# Altium PCB B_Card.PcbDoc
Units mm, origin at the board's own origin, x right, y up, seen from the top; angles counter-clockwise.
Board outline 85.6 x 65.43 mm, 2 copper layers (Top Component Side, Bottom Layer), stack 0.86 mm thick; 13 components, 9 nets, 39 pads, 13 vias.
Unrouted connection lines stored in the file: 2.
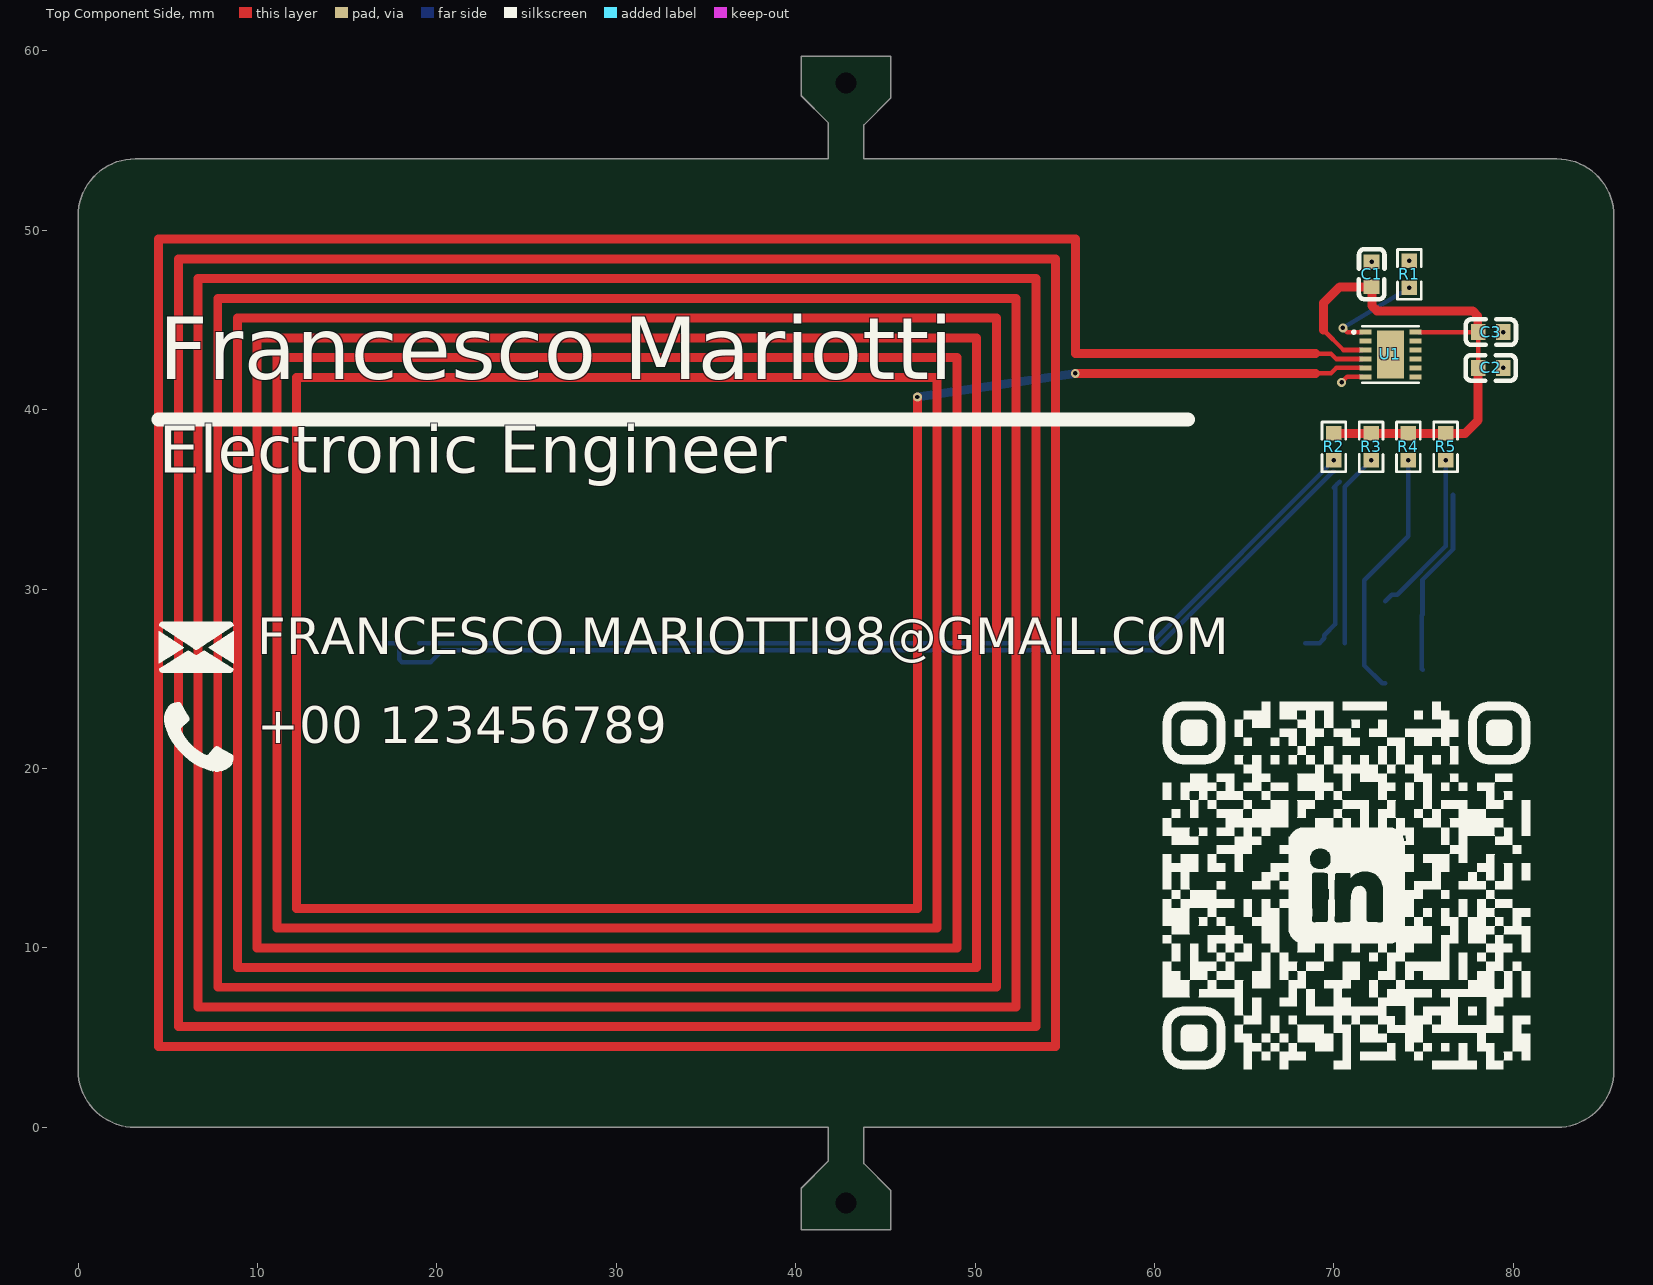
[diagram p0: Top Component Side view]
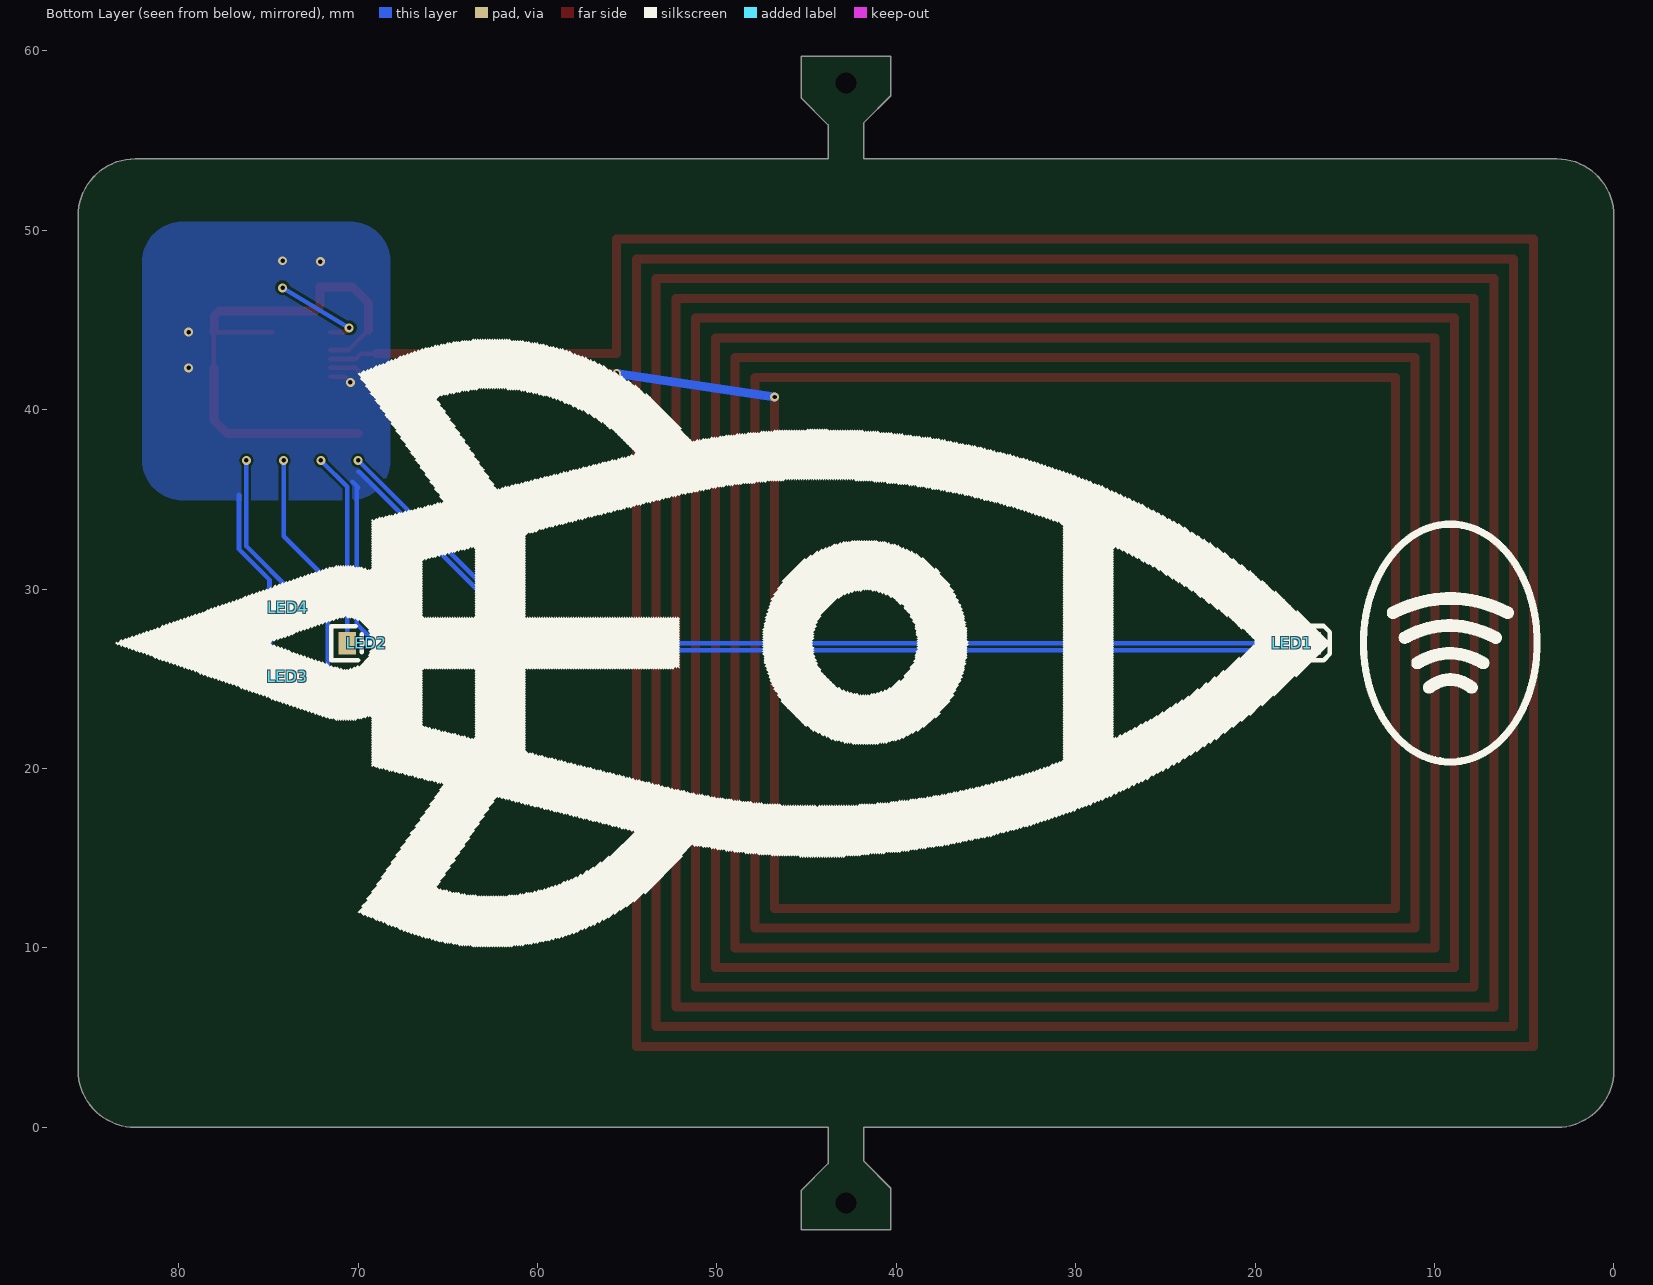
[diagram p1: Bottom Layer view, seen from below]

## Layer stack, top to bottom
Top Solder: solder mask 0.0102, Solder Resist, Dk 3.5
Top Component Side: signal copper 0.03
Dielectric 3: prepreg 0.8, FR-4, Dk 4.58
Bottom Layer: signal copper 0.03
Bottom Solder: solder mask 0.0102, Solder Resist, Dk 3.5

## Board outline
40.3,-5.725 40.3,-3.395 41.8,-1.895 41.8,0 3.18,0 cw(c3.18,3.18) 0,3.18 0,50.8 cw(c3.18,50.8) 3.18,53.98 41.8,53.98 41.8,56 40.3,57.5 40.3,59.705 45.3,59.705 45.3,57.375 43.8,55.875 43.8,53.98 82.42,53.98 cw(c82.42,50.8) 85.6,50.8 85.6,3.18 cw(c82.42,3.18) 82.42,0 43.8,0 43.8,-2.02 45.3,-3.52 45.3,-5.725

## Design rules (kind name [scope] priority, off if disabled: settings)
AssemblyTestPointUsage SilkToBoardRegionClearance [All] p2:
BoardOutlineClearance [All] p1: gap=2 ignorepadtopadclearanceinfootprint=FALSE
Clearance [All] p1: gap=0.152 ignorepadtopadclearanceinfootprint=FALSE except(0: Arc-Hole Track-Hole SMDPad-Hole THPad-Hole Via-Hole Fill-Hole Poly-Hole Region-Hole Text-Hole)
MatchedLengths DiffPair_DIFF100MatchedLengths [InDifferentialPairClass('DIFF100')] p1: tolerance=0.152 checknetsindiffpair=TRUE checkdiffpairvsdiffpair=FALSE checkxsignals=FALSE checkothers=FALSE
MinimumSolderMaskSliver SilkscreenOverComponentPads_1 [All] p2: minsoldermaskwidth=0.254
MinimumSolderMaskSliver SilkToSolderMaskClearance [IsPad] p3: minsoldermaskwidth=0.254
MinimumSolderMaskSliver SilkscreenOverComponentPads [All] p4: minsoldermaskwidth=0.254
PolygonConnect [All] p1: connectstyle=Direct reliefconductorwidth=0.254 reliefentries=4 polygonreliefangle="90 Angle" airgapwidth=0.254
RoutingVias [All] p1: holewidth=0.305 width=0.635 viastyle="Through Hole" minholewidth=0.305 minwidth=0.635 maxholewidth=0.711 maxwidth=1.27
SilkToBoardRegionClearance SilkToBoardRegionClearance_1 [All] p1:
SilkToSolderMaskClearance SilkToSolderMaskClearance_1 [IsPad] p1: minsilkscreentomaskgap=0.254 clearancetoexposedcopper=TRUE
SolderMaskExpansion [All] p1: expansion=0.102 istentingtop=FALSE
Width [All] p1: maxlimit=2.54 minlimit=0.152 preferedwidth=0.254
28 further rules are at their usual default settings.

## Components (designator, comment, footprint, x,y, rotation, side; value= is the part's Value field where it differs from the comment)
C1 "10nF" C0603 72.1,47.547 r270 top locked
C2 "10nF" C0603 78.739,42.325 r0 top locked
C3 "100nF" C0603 78.739,44.325 r180 top locked
LED1 "XL-2012UWC" LED0805-RD_WHITE 17.925,26.99 r0 bottom
LED2 "XL-2012UWC" LED0805-RD_WHITE 69.5,26.99 r0 bottom
LED3 "XL-2012UWC" LED0805-RD_WHITE 73.903,25.125 r200 bottom
LED4 "XL-2012UWC" LED0805-RD_WHITE 73.9,28.95 r160 bottom
R1 "1kΩ" R0603 74.2,47.547 r90 top locked
R2 "1kΩ" R0603 69.996,37.923 r90 top
R3 "1kΩ" R0603 72.073,37.923 r90 top
R4 "1kΩ" R0603 74.15,37.923 r90 top
R5 "1kΩ" R0603 76.227,37.923 r90 top
U1 "ST25DV04K-JFR8D3" UDFN-12_L3.0-W3.0-P0.50-BL-EP 73.15,43.075 r270 top

## Footprints (in the part's own frame and the unit in brackets; to place one, negate y for a bottom-side part, rotate by r counter-clockwise, add the part's x,y. Pads: shape width x height; smd on the part's side, far side on the other; paste and mask are expansions set on the pad)
C0603 [mm]
  rect 0.8x0.9 smd: 1(-0.7,0) 2(0.7,0)
  silkscreen extent -1.41,-0.71 1.39,0.72
LED0805-RD_WHITE [mm]
  rect 1x1.25 smd: 1(-1.1,0) 2(1.1,0)
  silkscreen extent -2.1,-0.95 1.98,0.96
R0603 [mm]
  rect 0.806x0.864 smd: 1(-0.753,0) 2(0.753,0)
  silkscreen extent -1.39,-0.66 1.39,0.66
UDFN-12_L3.0-W3.0-P0.50-BL-EP [mm]
  rect 0.28x0.665 smd: 1(-1.25,-1.401) 2(-0.75,-1.401) 3(-0.25,-1.401) 4(0.25,-1.401) 5(0.75,-1.401) 6(1.25,-1.401) 7(1.25,1.4) 8(0.75,1.4) 9(0.25,1.4) 10(-0.25,1.4) 11(-0.75,1.4) 12(-1.25,1.4)
  rect 2.65x1.5 smd: 13(0,0)
  silkscreen extent -1.58,-2.11 1.58,1.58

## Part data
C1 C2: BOM_JLCPCB Part Class="Extended Part", BOM_Manufacturer=MuRata, BOM_Manufacturer Part=GRM1885C1H103JA01D, BOM_Supplier=LCSC, BOM_Supplier Part=C85973, nameAlias=Capacitance, spicePre=C, spiceSymbolName=GRM1885C1H103JA01D
C3: BOM_JLCPCB Part Class="Extended Part", BOM_Manufacturer=MuRata, BOM_Manufacturer Part=GRM188R71E104KA01D, BOM_Supplier=LCSC, BOM_Supplier Part=C77050, nameAlias=Capacitance, spicePre=C, spiceSymbolName=GRM188R71E104KA01D
LED1 LED2 LED3 LED4: BOM_JLCPCB Part Class="Extended Part", BOM_Manufacturer=XINGLIGHT(成兴光), BOM_Manufacturer Part=XL-2012UWC, BOM_Supplier=LCSC, BOM_Supplier Part=C965818, Contributor=LCSC, link=https://atta.szlcsc.com/upload/public/pdf/source/20210104/C965818_E2ACBECB690C5CE73E796771E7D6A378.pdf, spicePre=L, spiceSymbolName=XL-2012UWC
R1 R2 R3 R4 R5: BOM_JLCPCB Part Class="Extended Part", BOM_Manufacturer=FOJAN(富捷), BOM_Manufacturer Part="FRC0603J102 TS", BOM_Supplier=LCSC, BOM_Supplier Part=C2907113, Contributor=lcsc, nameAlias=Resistance, spicePre=R, spiceSymbolName="FRC0603J102 TS"
U1: BOM_JLCPCB Part Class="Extended Part", BOM_Manufacturer=ST(意法半导体), BOM_Manufacturer Part=ST25DV04K-JFR8D3, BOM_Supplier=LCSC, BOM_Supplier Part=C2654867, Contributor=LCSC, spicePre=U, spiceSymbolName=ST25DV04K-JFR8D3

## Free pads (board coordinates)
  round 0 hole 1.152 unplated: 2(42.8,-4.225) 2(42.8,58.205)

## Via types
v1: diameter 0.5, hole 0.25, Top Component Side to Bottom Layer, tented both sides, 13 vias

## Nets (pads, with @x,y where several pads share a name; then routed paths per layer and width w, separated by ;. In a path a pad name is that pad's centre, name@x,y a point inside that pad or via, vN(x,y) a via of type N, cw(c..) or ccw(c..) an arc to the next point about the centre after c; other vN are vias at no path point)
Antenna: U1.4 U1.5 | length 1321.1
  Top Component Side w0.254: 55.575,43.125 55.581,43.125 ; 68.958,42.025 69.835,42.025 70.135,42.325 U1.5@71.55,42.325 ; 68.958,43.125 69.835,43.125 70.135,42.825 U1.4@71.55,42.825
  Top Component Side w0.5: v1(46.781,40.706) 46.781,12.206 12.181,12.206 12.181,41.806 47.881,41.806 47.881,11.106 11.081,11.106 11.081,42.906 48.981,42.906 48.981,10.006 9.981,10.006 9.981,44.006 50.081,44.006 50.081,8.906 8.881,8.906 8.881,45.106 51.181,45.106 51.181,7.806 7.781,7.806 7.781,46.206 52.281,46.206 52.281,6.706 6.681,6.706 6.681,47.306 53.381,47.306 53.381,5.606 5.581,5.606 5.581,48.406 54.481,48.406 54.481,4.506 4.481,4.506 4.481,49.506 54.481,49.506 55.581,49.506 55.581,43.125 68.958,43.125 ; v1(55.578,42.025) 68.958,42.025
  Bottom Layer w0.5: v1(46.781,40.706) v1(55.578,42.025)
GND: C1.1 C2.2 C3.1 LED1.1 LED2.1 LED3.1 LED4.1 R1.2 U1.6 | length 80.4
  Top Component Side w0.254: v1@70.427,41.523 70.729,41.825 U1.6@71.55,41.825
  Bottom Layer w0.254: LED1.1 17.686,26.99 17.898,26.778 17.898,26.081 18.047,25.933 19.65,25.933 20.301,26.584 59.985,26.584 69.939,36.537 69.996,36.537 ; LED2.1 69.196,26.99 69.459,27.253 69.459,27.43 70.08,28.051 70.08,35.649 ; 69.982,35.649 70.166,35.833 70.166,35.837 70.313,35.983 ; LED3.1 74.893,25.546 74.893,28.533 LED4.1 74.934,30.53 76.633,32.229 76.633,35.256
  other v1: 70.427,41.523 79.439,42.325 79.439,44.325 72.1,48.247 74.2,48.3
NetLED1_2: LED1.2 R2.1 | length 55.2
  Bottom Layer w0.254: LED1.2 59.817,26.99 v1(69.996,37.169)
NetLED2_2: LED2.2 R3.1 | length 10.8
  Bottom Layer w0.254: LED2.2 70.6,35.696 v1(72.073,37.169)
NetLED3_2: LED3.2 R4.1 | length 14
  Bottom Layer w0.254: LED3.2 72.684,24.749 71.695,25.738 71.695,30.499 74.15,32.954 v1(74.15,37.169)
NetLED4_2: LED4.2 R5.1 | length 9.4
  Bottom Layer w0.254: LED4.2 73.23,29.69 73.519,29.69 76.227,32.398 v1(76.227,37.169)
NetLED5_2: 
NetR1_1: R1.1 U1.1 | length 5.5
  Top Component Side w0.254: v1(70.492,44.563) 70.73,44.325 U1.1@71.55,44.325
  Bottom Layer w0.254: v1(70.492,44.563) v1(74.2,46.794)
VCC: C1.2 C2.1 C3.2 R2.2 R3.2 R4.2 R5.2 U1.3 U1.12 | length 31.7
  Top Component Side w0.254: 69.425,44.429 70.529,43.325 U1.3@71.55,43.325 ; U1.12@74.75,44.325 C3.2 C2.1
  Top Component Side w0.5: 69.425,44.429 69.425,45.95 70.322,46.847 C1.2@72.15,46.847 ; R2.2 71.073,38.676 73.15,38.676 75.227,38.676 77.304,38.676 78.039,39.411 C2.1 ; C1.2@72.113,46.697 72.113,45.797 72.406,45.504 77.722,45.504 78.014,45.211 78.014,44.525 78.039,44.5 C3.2
pads on no net: U1.2 U1.7 U1.8 U1.9 U1.10 U1.11 U1.13

## Polygon pours and split planes (outlines as drawn)
GND on Bottom Layer "GND_L02_P000" (solid, remove dead copper, pour order 0): 70.451,50.486 ccw(c70.451,48.234) 68.2,48.234 68.2,37.2 ccw(c70.455,37.2) 70.455,34.945 79.762,34.945 ccw(c79.762,37.201) 82.018,37.201 82.018,48.231 ccw(c79.762,48.231) 79.762,50.486

## Silkscreen, mask and mechanical layers (free items; w line width, h text height)
Top Overlay:
  drawing of 130 lines, arcs and shapes, not listed
  text "Francesco Mariotti" at 4.498,40.55 h6
  text "Electronic Engineer" at 4.498,35.627 h4.5
  text "FRANCESCO.MARIOTTI98@GMAIL.COM" at 9.981,25.695 h3.5
  text "+00 123456789" at 9.985,20.732 h3.5
Bottom Overlay:
  drawing of 7 lines, arcs and shapes, not listed
Board Cutout:
  lines w0.254: 0,3.18 ccw(c3.18,3.18) 3.18,0 41.8,0 41.8,-1.895 40.3,-3.395 40.3,-5.725 42.8,-5.725 45.3,-5.725 45.3,-3.52 43.8,-2.02 43.8,0 82.42,0 ccw(c82.42,3.18) 85.6,3.18 85.6,50.8 ccw(c82.42,50.8) 82.42,53.98 43.8,53.98 43.8,55.875 45.3,57.375 45.3,59.705 42.8,59.705 40.3,59.705 40.3,57.5 41.8,56 41.8,53.98 3.18,53.98 ccw(c3.18,50.8) 0,50.8 0,3.18